# Altium PCB SCP_Controller.PcbDoc (part 2 of 2)
Units mm, origin at the board's own origin, x right, y up, seen from the top; angles counter-clockwise.
Board outline 53.34 x 68.58 mm, 2 copper layers (Top Layer, Bottom Layer); 54 components, 29 nets, 159 pads, 26 vias.
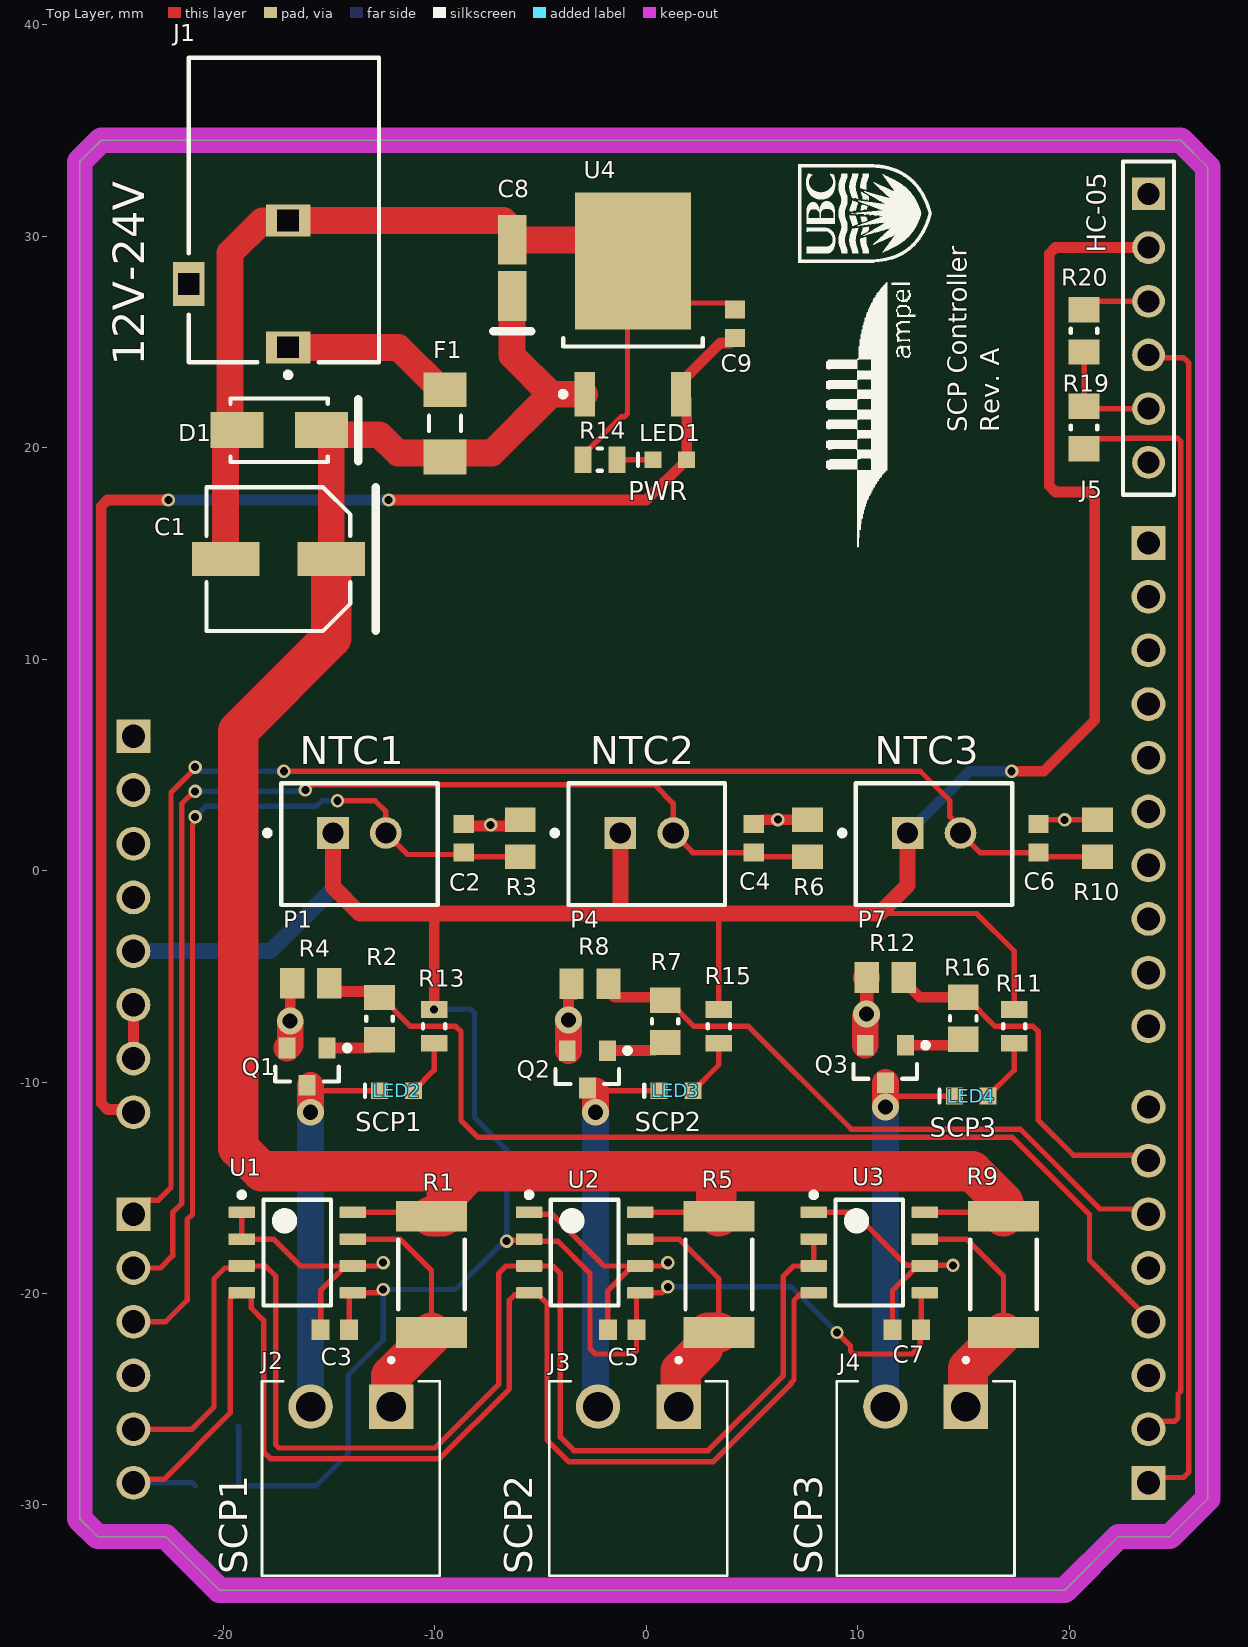
[diagram p0: Top Layer view]

## Part data (continued)
R19: library part CMP-2100-03671-1, "Chip Resistor, 1 KOhm, +/- 1%, 125 mW, -55 to 155 degC, 0805 (2012 Metric), RoHS, Tape and Reel", Case Code (Imperial)=0805, Case Code (Metric)=2012, Manufacturer=Yageo, Manufacturer Part Number=RC0805FR-071KL, Max Operating Temperature=155degC, Max Power Dissipation=125mW, Min Operating Temperature=-55degC, Package Description="2-Pin Surface Mounted Device, Body 2 x 1.25 mm", Package Quantity=1, Resistance=1KOhm, Supplier Part Number 1=311-1.00KCRCT-ND, Temperature Coefficient=100ppm/degreesC, Tolerance=1%, Voltage Rating=150V, Case/Package=0805, Category="Chip SMD Resistors", ComponentLink1Description=https://datasheet.ciiva.com/2456/pyu-r-int-thick-7-2456976.pdf?src-supplier=Digi-Key, ComponentLink1URL=https://datasheet.ciiva.com/2456/pyu-r-int-thick-7-2456976.pdf?src-supplier=Digi-Key, ComponentLink2Description=https://datasheet.ciiva.com/2456/pyu-r-int-thick-7-2456977.pdf?src-supplier=Digi-Key, ComponentLink2URL=https://datasheet.ciiva.com/2456/pyu-r-int-thick-7-2456977.pdf?src-supplier=Digi-Key, ComponentLink3Description=https://datasheet.ciiva.com/7941/1686128-7941719.pdf?src-supplier=Element14, ComponentLink3URL=https://datasheet.ciiva.com/7941/1686128-7941719.pdf?src-supplier=Element14, ComponentLink4Description=https://datasheet.ciiva.com/16850/rc0805-16850409.pdf?src-supplier=Future+Electronics, ComponentLink4URL=https://datasheet.ciiva.com/16850/rc0805-16850409.pdf?src-supplier=Future+Electronics, ComponentLink5Description=https://datasheet.ciiva.com/46385/444164-46385020.pdf?src-supplier=Element14, ComponentLink5URL=https://datasheet.ciiva.com/46385/444164-46385020.pdf?src-supplier=Element14, ComponentLink6Description=https://datasheet.ciiva.com/2456/pyu-r-int-thick-7-2456975.pdf?src-supplier=Digi-Key, ComponentLink6URL=https://datasheet.ciiva.com/2456/pyu-r-int-thick-7-2456975.pdf?src-supplier=Digi-Key, Composition=ThickFilm, Datasheet URL=http://www.yageo.com/NewPortal/yageodocoutput?fileName=/pdf/R-Chip/PYu-RC_Group_51_RoHS_L_5.pdf, Datasheet Version="Rev. 5, 10/2016", Depth=1.25mm, Features="Moisture Resistant", Height=0.024inch, Lead Free=LeadFree, Length=0.079inch, Manufacturer URL=http://www.yageo.com/, Military Standard=Not, Number of Pins=2, Number of Terminations=2, Package Reference=0805, Packaging=TapeandReel, Power Rating=125mW, Pricing 1="1=0.10000, 10=0.04000, 100=0.01630, 1000=0.00731, 2500=0.00635 (USD)", REACH SVHC=Unknown, RoHS=Yes, RoHSCompliant=true, Stock 1=24922919, Supplier 1=Digi-Key, Termination=SMD/SMT, Voltage Rating (DC)=150V, Width=0.049inch
R20: library part CMP-2100-03671-1, "Chip Resistor, 2 KOhm, +/- 1%, 125 mW, -55 to 155 degC, 0805 (2012 Metric), RoHS, Tape and Reel", Case Code (Imperial)=0805, Case Code (Metric)=2012, Manufacturer=Yageo, Manufacturer Part Number=RC0805FR-072KL, Max Operating Temperature=155°C, Max Power Dissipation=125mW, Min Operating Temperature=-55°C, Package Quantity=1, Resistance=2kR, Supplier Part Number 1=311-2.00KCRCT-ND, Temperature Coefficient=100ppm/°C, Tolerance=1%, Voltage Rating=150V, Case/Package=0805, Category="Chip SMD Resistors", ComponentLink1Description=https://datasheet.ciiva.com/11819/0900766b8106beab-11819830.pdf?src-supplier=RSComponents, ComponentLink1URL=https://datasheet.ciiva.com/11819/0900766b8106beab-11819830.pdf?src-supplier=RSComponents, ComponentLink2Description=https://datasheet.ciiva.com/2457/pyu-r-int-thick-7-2457026.pdf?src-supplier=Digi-Key, ComponentLink2URL=https://datasheet.ciiva.com/2457/pyu-r-int-thick-7-2457026.pdf?src-supplier=Digi-Key, ComponentLink3Description=https://datasheet.ciiva.com/2457/pyu-r-int-thick-7-2457027.pdf?src-supplier=Digi-Key, ComponentLink3URL=https://datasheet.ciiva.com/2457/pyu-r-int-thick-7-2457027.pdf?src-supplier=Digi-Key, ComponentLink4Description=https://datasheet.ciiva.com/2457/pyu-r-int-thick-7-2457028.pdf?src-supplier=Digi-Key, ComponentLink4URL=https://datasheet.ciiva.com/2457/pyu-r-int-thick-7-2457028.pdf?src-supplier=Digi-Key, ComponentLink5Description=https://datasheet.ciiva.com/46395/444164-46395128.pdf?src-supplier=Element14, ComponentLink5URL=https://datasheet.ciiva.com/46395/444164-46395128.pdf?src-supplier=Element14, ComponentLink6Description=https://datasheet.ciiva.com/12667/rc0805-12667946.pdf?src-supplier=Mouser, ComponentLink6URL=https://datasheet.ciiva.com/12667/rc0805-12667946.pdf?src-supplier=Mouser, Composition="Thick Film", Depth=1.25mm, Features="Moisture Resistant", Height=0.024inch, Lead Free="Lead Free", Length=2mm, Military Standard=Not, Number of Pins=2, Number of Terminations=2, Packaging="Tape and Reel", Power Rating=125mW, Pricing 1="1=0.10000, 10=0.04000, 100=0.01630, 1000=0.00731, 2500=0.00635 (USD)", REACH SVHC="No SVHC", RoHS=Yes, Stock 1=3783164, Supplier 1=Digi-Key, Termination=SMD/SMT, Voltage Rating (DC)=150V, Width=0.049inch, Working Voltage=150V
U1 U2 U3: library part CMP-0704-00003-2, "Zero-Drift, Bi-Directional Current / Power Monitor, 3 to 5.5 V, -40 to 125 degC, 8-pin SOIC (D8), Green (RoHS & no Sb/Br)", Case/Package=SOIC, Input Offset Voltage (Vos)=10uV, Manufacturer="Texas Instruments", Max Operating Temperature=125°C, Max Supply Voltage=5.5V, Min Operating Temperature=-40°C, Min Supply Voltage=3V, Operating Supply Current=1mA, Output Current=10mA, Package Quantity=2500, Quiescent Current=700uA, Quiescent Current (+/-)(Typ)(mA)=0.7, Rating=Catalog, Supplier Part Number 1=296-23978-1-ND, Accuracy=1%, Category="Amplifiers - Op Amps, Buffer, Instrumentation", CMRR(Min)(dB)=100, Code_JEDEC=MS-012, Common Mode Range(Max)(V)=26, Common Mode Range(Min)(V)=0, Common Mode Rejection Ratio=100dB, ComponentLink1Description="Manufacturer URL", ComponentLink1URL=http://www.ti.com/, ComponentLink2Description=Datasheet, ComponentLink2URL=http://www.ti.com/general/docs/lit/getliterature.tsp?genericPartNumber=INA219&fileType=pdf, ComponentLink3Description="Package Specification", ComponentLink3URL=http://www.ti.com/lit/ml/msoi002j/msoi002j.pdf, ComponentLink4Description=https://datasheet.ciiva.com/15132/getdatasheetpartid-306418-15132613.pdf?src-supplier=Verical, ComponentLink4URL=https://datasheet.ciiva.com/15132/getdatasheetpartid-306418-15132613.pdf?src-supplier=Verical, ComponentLink5Description=https://datasheet.ciiva.com/26875/ina219aidr-26875810.pdf?src-supplier=IIIC, ComponentLink5URL=https://datasheet.ciiva.com/26875/ina219aidr-26875810.pdf?src-supplier=IIIC, ComponentLink6Description=https://datasheet.ciiva.com/1939/ina219-1939579.pdf?src-supplier=Digi-Key, ComponentLink6URL=https://datasheet.ciiva.com/1939/ina219-1939579.pdf?src-supplier=Digi-Key, ComponentLink7Description=https://datasheet.ciiva.com/1939/ina219-1939580.pdf?src-supplier=Digi-Key, ComponentLink7URL=https://datasheet.ciiva.com/1939/ina219-1939580.pdf?src-supplier=Digi-Key, ComponentLink8Description=https://datasheet.ciiva.com/1939/ina219-1939581.pdf?src-supplier=Digi-Key, ComponentLink8URL=https://datasheet.ciiva.com/1939/ina219-1939581.pdf?src-supplier=Digi-Key, ComponentLink9Description=https://datasheet.ciiva.com/2965/ina219-2965727.pdf?src-supplier=Avnet, ComponentLink9URL=https://datasheet.ciiva.com/2965/ina219-2965727.pdf?src-supplier=Avnet, Contact Plating=Gold, DatasheetVersion=SBOS448F, Eco-Plan="Green (RoHS & no Sb/Br)", Gain(V/V)="1, 0.5, 0.25, 0.125", Input Offset (+/-)(Max)(uV)=100, Lead Free="Lead Free", Manufacturer Part Number=INA219AIDR, Mounting Technology="Surface Mount", Number of Amplifiers=1, Number of Pins=8, PackageDescription="8-Pin Plastic Small Outline, Body 4.9 x 3.9 mm, Pitch 1.27 mm", PackageReference=D0008A, PackageVersion="4040047-3/M, 06/2011", Packaging="Tape and Reel", PartNumber=INA219AIDR, Pricing 1="1=2.14000, 10=1.92200, 25=1.81280, 100=1.45020, 250=1.26896, 500=1.23270, 1000=0.97891 (USD)", Radiation Hardening=No, REACH SVHC="No SVHC", Small-Signal Bandwidth(Typ)(MHz)=0.011, Stock 1=5271, SubFamily="Current Shunt Monitor", Supplier 1=Digi-Key, Vs(Max)(V)=5.5, Vs(Min)(V)=3, Weight=0.002561oz
  U1: Address=0x40
  U2: Address=0x41
  U3: Address=0x42
U4: library part CMP-0244-00194-1, Case/Package=DPAK, Dropout Voltage=2V, Manufacturer="ON Semiconductor", Manufacturer Part Number=MC78M09CDTRKG, Max Input Voltage=35V, Max Operating Temperature=125°C, Max Output Current=500mA, Min Operating Temperature=0°C, Min Output Voltage=9V, Package Quantity=1, Power Rating=5W, Quiescent Current=6mA, Supplier Part Number 1=MC78M09CDTRKGOSCT-ND, Category="Voltage Regulators - Linear", ComponentLink1Description=https://datasheet.ciiva.com/2059/mc78m00-d-2059824.pdf?src-supplier=Digi-Key, ComponentLink1URL=https://datasheet.ciiva.com/2059/mc78m00-d-2059824.pdf?src-supplier=Digi-Key, ComponentLink2Description=https://datasheet.ciiva.com/8234/mc78m00-d-8234074.pdf?src-supplier=Avnet, ComponentLink2URL=https://datasheet.ciiva.com/8234/mc78m00-d-8234074.pdf?src-supplier=Avnet, ComponentLink3Description=https://datasheet.ciiva.com/6591/mc78m00-d-6591293.pdf?src-supplier=Digi-Key, ComponentLink3URL=https://datasheet.ciiva.com/6591/mc78m00-d-6591293.pdf?src-supplier=Digi-Key, ComponentLink4Description=https://datasheet.ciiva.com/2059/mc78m00-d-2059823.pdf?src-supplier=Digi-Key, ComponentLink4URL=https://datasheet.ciiva.com/2059/mc78m00-d-2059823.pdf?src-supplier=Digi-Key, Contact Plating=Tin,Matte, Halogen Free="Halogen Free", Height=2.38mm, Lead Free="Lead Free", Length=6.73mm, Min Input Voltage=35V, Mount="Surface Mount", Nominal Output Voltage=9V, Number of Outputs=1, Number of Pins=3, Number of Regulators=1, Output Current=500mA, Output Type=Fixed, Output Voltage=9V, Packaging="Tape and Reel", Polarity=Positive, Pricing 1="1=0.43000, 10=0.37000, 25=0.34520, 100=0.25650, 250=0.21708, 500=0.20720, 1000=0.15294 (USD)", Radiation Hardening=No, REACH SVHC="No SVHC", RoHS=Yes, Stock 1=7157, Supplier 1=Digi-Key, Width=6.22mm

## Via types
v1: diameter 0.635, hole 0.381, Top Layer to Bottom Layer, 20 vias
v2: diameter 1.27, hole 0.711, Top Layer to Bottom Layer, 6 vias

## Nets (pads, with @x,y where several pads share a name; then routed paths per layer and width w, separated by ;. In a path a pad name is that pad's centre, name@x,y a point inside that pad or via, vN(x,y) a via of type N, cw(c..) or ccw(c..) an arc to the next point about the centre after c; other vN are vias at no path point)
+5V: C3.1 C5.1 C7.1 J5.2 P1.1 P2.5 P4.1 P7.1 R13.1 R15.1 R16.1 R17.2 R18.2 U1.5 U2.2 U2.5 U3.5 | length 181.2
  Top Layer w0.254: C3.1 -14.057,-20.115 -13.909,-19.967 U1.5 -12.705,-19.967 -12.549,-19.812 v1(-12.446,-19.812) ; v1(-6.604,-17.526) -6.555,-17.477 -5.595,-17.477 U2.2 -5.447,-17.526 -4.191,-17.526 -2.667,-19.05 -2.667,-22.606 -2.413,-22.86 -0.635,-22.86 -0.468,-22.693 C5.1 -0.468,-20.115 -0.32,-19.967 U2.5 0.734,-19.967 v1(1.016,-19.685) ; 3.302,-2.032 3.429,-2.159 R15.1 ; v1(9.017,-21.844) 9.652,-22.479 9.652,-22.711 9.801,-22.86 12.573,-22.86 12.954,-22.479 12.954,-21.757 C7.1 ; 11.01,-2.032 15.621,-2.032 17.399,-3.81 R16.1@17.399,-6.439 ; C7.1@12.994,-21.514 U3.5@12.994,-20.115 ; U3.5@12.994,-19.912 U3.5@12.994,-20.115 ; U3.5 13.142,-19.967 U3.5@12.994,-20.115 ; R16.1@17.272,-6.439 R16.1
  Top Layer w0.508: v1(-10.033,-6.566) -10.033,-2.032 -10.033,-1.994 ; v1(17.272,4.699) 18.796,4.699 21.209,7.112 21.209,17.609 20.911,17.907 19.348,17.907 19.05,18.205 19.05,29.166 19.348,29.464 J5.2@24.031,29.464
  Top Layer w0.762: P2.5 P2.5@-24.257,-3.771 ; P1.1 -14.82,-0.764 -13.552,-2.032 -10.033,-2.032 -1.231,-2.032 3.302,-2.032 11.01,-2.032 12.358,-0.684 P7.1 ; -1.231,-1.994 P4.1
  Bottom Layer w0.254: R17.2 -19.278,-26.289 -19.278,-29.043 R18.2 -15.631,-29.093 -14.097,-27.559 -14.097,-23.864 -12.446,-22.213 v1(-12.446,-19.812) -9.017,-19.812 -6.907,-17.702 -6.884,-17.702 -6.707,-17.526 v1(-6.604,-17.526) -6.604,-13.208 -8.128,-11.684 -8.128,-6.731 -8.293,-6.566 v1(-10.033,-6.566) ; v1(1.016,-19.685) 6.858,-19.685 v1(9.017,-21.844)
  Bottom Layer w0.508: P7.1 15.279,4.699 v1(17.272,4.699)
  Bottom Layer w0.762: P2.5 -17.78,-3.81 -14.82,-0.85 P1.1
+9V: C9.1 LED1.2 P2.8 U4.3 | length 65.7
  Top Layer w0.254: P2.8@-24.384,-11.303 P2.8 ; U4.3@1.905,22.269 U4.3 1.645,23.104 U4.3@1.993,23.452 ; C9.1@3.954,24.956 C9.1
  Top Layer w0.508: P2.8@-24.384,-11.303 -25.483,-11.303 -25.781,-11.005 -25.781,17.228 -25.483,17.526 v1(-22.606,17.526) ; v1(-12.192,17.526) 0,17.526 LED1.2 U4.3@1.905,22.269 ; U4.3@1.993,23.452 3.497,24.956 C9.1@3.954,24.956
  Bottom Layer w0.508: v1(-22.606,17.526) v1(-12.192,17.526)
GND: C1.2 C2.2 C3.2 C4.2 C5.2 C6.2 C7.2 C8.2 C9.2 D1.1 J1.2 J5.3 P2.6 P2.7 Q1.2 Q2.2 Q3.2 R3.1 R4.1 R6.1 R8.1 R10.1 R12.1 R14.1 R20.1 U1.1 U1.2 U1.6 U2.1 U2.6 U3.1 U3.6 U4.4 | length 113.5
  Top Layer w0.254: U1.1 U1.2 -17.625,-17.427 -16.355,-18.697 U1.6@-14.235,-18.697 ; C3.2 -15.407,-19.869 U1.6@-14.235,-18.697 ; v1(-12.446,-18.542) -12.549,-18.542 -12.705,-18.697 U1.6 U1.6@-14.235,-18.697 ; -6.742,2.112 R3.1@-6.455,2.399 ; U2.1@-5.518,-16.129 U2.1 -5.447,-16.256 -4.445,-16.256 -2.004,-18.697 U2.6@-0.646,-18.697 ; R14.1 -2.997,19.656 -1.19,21.463 -1.038,21.463 -0.889,21.612 -0.889,28.376 0.646,26.841 3.893,26.841 C9.2 C9.2@4.489,26.245 ; C5.2 -1.818,-19.869 U2.6@-0.646,-18.697 ; U4.4 U4.4@1.905,31.369 ; v1(1.016,-18.542) 0.913,-18.542 0.757,-18.697 U2.6 U2.6@-0.646,-18.697 ; C4.2@5.207,2.199 C4.2@5.407,2.399 ; U3.1 9.793,-16.157 12.309,-18.674 12.792,-18.674 U3.6@12.816,-18.697 ; v2@10.414,-6.858 v2(10.414,-6.782) ; C7.2 11.644,-19.869 U3.6@12.816,-18.697 ; v1(14.503,-18.669) 13.194,-18.669 U3.6 U3.6@12.816,-18.697 ; C6.2 18.742,2.399 v1(19.785,2.399) R10.1@20.828,2.399 ; R20.1 21.098,26.924 J5.3 ; J5.3@23.968,27.023 J5.3@24.066,26.924
  Top Layer w0.508: P2.7 P2.6 ; R4.1@-16.863,-5.719 -16.844,-5.738 v2(-16.844,-7.112) ; Q1.2@-16.844,-8.371 Q1.2@-16.825,-8.39 ; C2.2@-8.509,2.112 -6.742,2.112 ; R3.1@-6.455,2.399 R3.1@-6.366,2.31 ; v2(-3.683,-7.061) -3.683,-6.035 R8.1@-3.509,-5.861 ; R8.1@-3.401,-5.842 R8.1@-3.382,-5.861 ; v2@-3.382,-7.384 v2@-3.382,-7.178 ; C4.2@5.407,2.399 R6.1@7.493,2.399 ; v2(10.414,-6.782) R12.1@10.414,-5.094
  Top Layer w0.635: v2(10.414,-6.782) 10.421,-6.775 R12.1@10.421,-5.087 ; R12.1@10.421,-5.062 R12.1
  Top Layer w1.27: C1.2 -19.899,20.613 -19.684,20.828 D1.1@-19.47,20.828 ; D1.1 D1.1@-19.47,20.828 ; Q1.2 -16.844,-8.237 v2(-16.844,-7.112) ; Q2.2@-3.683,-8.513 v2(-3.683,-7.061) ; U4.4 -1.634,29.828 C8.2 -6.35,30.328 -6.764,30.742 J1.2 -16.953,30.734 -18.161,30.734 -19.685,29.21 -19.685,21.043 D1.1@-19.47,20.828 ; Q3.2 10.353,-6.919 v2@10.414,-6.858 ; R12.1@10.414,-5.069 R12.1@10.421,-5.062
  other v1: -7.366,2.159 6.223,2.413
NetC2_1: C2.1 P1.2 P3.3 R3.2 | length 42.9
  Top Layer w0.254: P3.3 -22.733,-21.336 -21.717,-20.32 -21.717,-16.51 -21.463,-16.256 -21.463,2.201 -21.409,2.255 -21.409,2.467 v1(-21.336,2.54) ; v1(-14.605,3.302) -12.827,3.302 -12.32,2.795 P1.2 -11.304,0.762 -8.509,0.762 -8.396,0.649 R3.2@-6.455,0.649
  Bottom Layer w0.254: v1(-21.336,2.54) -20.828,3.048 -15.597,3.048 -15.343,3.302 v1(-14.605,3.302)
NetC4_1: C4.1 P3.2 P4.2 R6.2 | length 55.7
  Top Layer w0.254: P3.2 -22.987,-18.796 -22.4,-18.209 -22.4,-16.177 -21.971,-15.748 -21.971,3.175 v1@-21.399,3.746 ; v1(-16.129,3.81) -16.044,3.81 -15.79,4.064 0.381,4.064 1.269,3.176 P4.2 2.198,0.849 5.207,0.849 5.407,0.649 R6.2@7.493,0.649
  Bottom Layer w0.254: v1@-21.399,3.746 -16.192,3.746 v1(-16.129,3.81)
  other v1: -21.336,3.746
NetC6_1: C6.1 P3.1 P7.2 R10.2 | length 67.2
  Top Layer w0.254: P3.1 -23.584,-15.583 -23.076,-15.583 -22.479,-14.986 -22.479,3.683 -21.336,4.826 v1(-21.336,4.889) ; v1(-17.145,4.699) 12.954,4.699 14.351,3.302 14.351,2.55 14.858,2.043 P7.2 15.787,0.849 C6.1 18.742,0.649 R10.2@20.828,0.649
  Bottom Layer w0.254: v1(-21.336,4.889) -21.145,4.699 v1(-17.145,4.699)
NetF1_1: F1.1 J1.1 | length 8.3
  Top Layer w1.27: J1.1 -11.719,24.742 -9.715,22.738 F1.1
NetJ2_1: J2.1 R1.1 U1.7 | length 11.7
  Top Layer w0.254: U1.7 -11.656,-17.427 -10.16,-18.923 R1.1 ; R1.1@-11.608,-21.438 R1.1@-11.444,-21.438
  Top Layer w1.905: J2.1 -12.065,-23.889 -10.16,-21.984 R1.1
NetJ2_2: J2.2 LED2.1 Q1.3 | length 18.6
  Top Layer w0.254: Q1.3@-15.875,-10.16 -15.621,-10.414 LED2.1
  Top Layer w1.27: v2(-15.875,-11.43) Q1.3@-15.875,-10.16
  Bottom Layer w1.27: J2.2 v2(-15.875,-11.43)
NetJ3_1: J3.1 R5.1 U2.7 | length 11.6
  Top Layer w0.254: U2.7 1.552,-17.427 3.429,-19.304 R5.1
  Top Layer w1.905: J3.1 1.622,-25.252 1.622,-23.651 2.706,-22.567 2.706,-22.072 2.934,-21.844 R5.1
NetJ3_2: J3.2 LED3.1 Q2.3 | length 18.4
  Top Layer w0.254: Q2.3 -2.66,-10.414 -2.413,-10.414 LED3.1
  Top Layer w1.27: v2(-2.413,-11.43) Q2.3@-2.413,-10.414
  Bottom Layer w1.27: v2(-2.413,-11.43) -2.413,-25.222 J3.2
NetJ4_1: J4.1 R9.1 U3.7 | length 11.5
  Top Layer w0.254: U3.7 15.141,-17.427 16.891,-19.177 R9.1 ; R9.1@15.443,-21.438 R9.1@15.607,-21.438
  Top Layer w1.905: J4.1 15.211,-25.252 15.211,-23.541 16.891,-21.86 R9.1
NetJ4_2: J4.2 LED4.1 Q3.3 | length 18.8
  Top Layer w0.254: v2(11.303,-11.176) 11.811,-10.668 LED4.1
  Top Layer w1.27: v2(11.303,-11.176) Q3.3
  Bottom Layer w1.27: J4.2 v2(11.303,-11.176)
NetJ5_4: J5.4 P5.1 | length 56.2
  Top Layer w0.254: P5.1@23.749,-28.702 25.4,-28.702 25.654,-28.448 25.654,24.003 25.4,24.257 24.193,24.257 J5.4@24.066,24.384
NetJ5_5: J5.5 R19.2 R20.2 | length 5.7
  Top Layer w0.254: R20.2 R19.2 20.812,21.844 J5.5
NetLED1_1: LED1.1 R14.2 | length 1.7
  Top Layer w0.254: R14.2 LED1.1
NetLED2_2: LED2.2 R13.2 | length 2.7
  Top Layer w0.254: LED2.2 -10.033,-9.436 R13.2
NetLED3_2: LED3.2 R15.2 | length 2.8
  Top Layer w0.254: LED3.2 3.429,-9.182 R15.2
NetLED4_2: LED4.2 R16.2 | length 3
  Top Layer w0.254: LED4.2 17.399,-9.436 R16.2
NetP3_5: P3.5 R17.1 U1.3 U2.3 U3.2 U3.3 | length 72.7
  Top Layer w0.254: P3.5 -21.494,-26.416 -20.447,-25.369 -20.447,-19.304 -19.939,-18.796 -19.106,-18.796 U1.3@-19.008,-18.697 ; U1.3 U1.3@-19.008,-18.697 ; U3.2 U3.3 6.957,-18.697 6.477,-19.177 6.477,-23.876 2.921,-27.432 -3.429,-27.432 -4.064,-26.797 -4.064,-19.05 -4.417,-18.697 U2.3 -6.632,-18.697 -6.985,-19.05 -6.985,-24.301 -9.989,-27.305 -17.377,-27.305 -17.526,-27.156 -17.526,-19.177 -18.006,-18.697 U1.3@-19.008,-18.697
  Bottom Layer w0.254: P3.5 -21.455,-26.416 R17.1
NetP3_6: P3.6 R18.1 U1.4 U2.4 U3.4 | length 67.7
  Top Layer w0.254: P3.6 -24.092,-28.791 -22.822,-28.791 -19.685,-25.654 -19.685,-20.264 -19.633,-20.212 -19.633,-20.115 -19.485,-19.967 -18.835,-19.967 -18.687,-20.115 -18.687,-20.683 -18.097,-21.273 -18.097,-27.496 -17.78,-27.813 -9.779,-27.813 -6.477,-24.511 -6.477,-20.32 -6.223,-20.066 -5.645,-20.066 U2.4 -5.196,-19.967 -4.699,-20.464 -4.699,-26.924 -3.661,-27.962 3.153,-27.962 6.858,-24.257 6.858,-24.213 6.985,-24.086 6.985,-20.32 7.239,-20.066 7.817,-20.066 U3.4
  Bottom Layer w0.254: P3.6 -21.465,-28.956 R18.1
NetP5_2: P5.2 R19.1 | length 52.6
  Top Layer w0.254: R19.1 21.174,20.428 22.601,20.428 22.62,20.447 25.124,20.447 25.273,20.298 25.273,-24.638 25.146,-24.765 25.146,-25.886 24.997,-26.035 23.876,-26.035 P5.2@23.749,-26.162
NetP5_4: P5.4 R2.1 R4.2 | length 48.4
  Top Layer w0.254: R2.1@-12.635,-6.005 -12.511,-6.005 -11.15,-7.366 -9.017,-7.366 -8.763,-7.62 -8.763,-11.811 -7.959,-12.615 17.314,-12.615 20.955,-16.256 20.955,-18.415 23.622,-21.082 P5.4@23.749,-21.082
  Top Layer w0.508: R4.2@-15.113,-5.719 -13.106,-5.719 R2.1@-13.106,-5.659
NetP5_6: P5.6 R7.1 R8.2 | length 29.6
  Top Layer w0.254: R7.1@0.746,-5.985 R7.1 1.014,-6.128 2.252,-7.366 4.826,-7.366 9.694,-12.234 17.695,-12.234 21.463,-16.002 P5.6@23.749,-16.002
  Top Layer w0.508: R8.2@-1.651,-5.842 -1.508,-5.985 R7.1@0.746,-5.985
NetP5_7: P5.7 R11.1 R12.2 | length 17.6
  Top Layer w0.254: R12.2@12.178,-5.205 R12.2 ; R11.1 15.108,-5.985 16.489,-7.366 18.288,-7.366 18.542,-7.62 18.542,-11.811 20.193,-13.462 P5.7@23.749,-13.462
  Top Layer w0.508: R12.2@12.178,-5.23 12.933,-5.985 R11.1
NetQ1_1: Q1.1 R2.2 | length 2.3
  Top Layer w0.508: Q1.1@-14.925,-8.39 -13.145,-8.39 R2.2@-12.76,-8.005
NetQ2_1: Q2.1 R7.2 | length 2.5
  Top Layer w0.508: Q2.1@-1.463,-8.513 0.379,-8.513 0.764,-8.128 R7.2
NetQ3_1: Q3.1 R11.2 | length 2.4
  Top Layer w0.254: R11.2@14.514,-8.259 R11.2@14.605,-8.35
  Top Layer w0.508: Q3.1 R11.2@14.514,-8.259
V_SCP: C1.1 C8.1 D1.2 F1.2 R1.2 R5.2 R9.2 U1.8 U2.8 U3.8 U4.1 | length 112
  Top Layer w0.254: U1.8 -10.347,-16.157 R1.2 ; U4.1 U4.1@-2.915,23.104 ; U2.8 R5.2@3.216,-16.157 ; R5.2@1.981,-15.938 R5.2@2.931,-15.938 ; U3.8 16.704,-16.157 R9.2 ; R9.2@15.443,-15.938 R9.2@16.393,-15.938
  Top Layer w1.27: D1.2 -15.114,20.828 D1.2@-14.899,20.613 ; C1.1 D1.2@-14.899,20.613 ; C8.1 -6.35,24.357 -4.522,22.529 ; U4.1 -4.522,22.529 ; D1.2@-14.899,20.613 -12.612,20.613 -11.747,19.748 -9.715,19.748 F1.2 -9.335,19.748 -7.303,19.748 -4.522,22.529
  Top Layer w1.905: C1.1 -14.899,11.009 -19.304,6.604 -19.304,-13.108 -18.188,-14.224 -8.322,-14.224 ; R1.2 -9.665,-16.344 -9.437,-16.117 -9.437,-15.34 -8.322,-14.224 ; R5.2 3.302,-16.217 3.302,-14.224 ; R9.2 16.891,-15.707 15.408,-14.224 3.302,-14.224 ; -8.322,-14.224 3.302,-14.224
pads on no net: J1.3 J5.1 J5.6 P2.1 P2.2 P2.3 P2.4 P3.4 P5.3 P5.5 P5.8 P6.1 P6.2 P6.3 P6.4 P6.5 P6.6 P6.7 P6.8 P6.9 P6.10

## Polygon pours and split planes (outlines as drawn)
GND on Bottom Layer "GND_L02_P003" (solid, pour order 3): -26.797,33.528 -25.781,34.544 25.273,34.544 26.289,33.528 26.289,-29.972 24.765,-31.496 22.225,-31.496 19.939,-33.782 19.939,-34.036 -20.193,-34.036 -22.733,-31.496 -26.035,-31.496 -26.797,-30.734

## Keep-outs
Keep-Out Layer:
  the board outline again, w1.2

## Silkscreen, mask and mechanical layers (free items; w line width, h text height)
Top Overlay:
  drawing of 26 lines, arcs and shapes, not listed
  text "HC-05" at 22.034,29.23 h1.52 r90
  text "12V-24V" at -23.241,23.876 h2.54 r90
  text "SCP Controller / Rev. A" at 16.99,20.74 h1.52 r90
  text "PWR" at -0.849,17.209 h1.52
  text "NTC1" at -16.381,4.574 h2.29
  text "NTC2" at -2.665,4.574 h2.29
  text "NTC3" at 10.797,4.574 h2.29
  text "SCP1" at -13.765,-12.636 h1.52
  text "SCP2" at -0.557,-12.636 h1.52
  text "SCP3" at 13.413,-12.89 h1.52
  text "SCP1" at -18.417,-33.272 h2.29 r90
  text "SCP2" at -4.955,-33.272 h2.29 r90
  text "SCP3" at 8.761,-33.272 h2.29 r90

## Dimensions
25.273,34.544 to 19.787,-34.036 on Dimensions
-26.797,33.528 to 26.543,33.274 on Dimensions

## Text inside footprints (layer, text, board x,y; h text height)
P2: Bottom Overlay "1" at -21.336,6.477 h1.02 r90; Bottom Overlay "8" at -21.336,-11.049 h1.02 r90
P3: Bottom Overlay "1" at -21.26,-16.154 h1.02 r90; Bottom Overlay "6" at -21.311,-30.429 h1.02 r90
P5: Bottom Overlay "1" at 20.93,-29.235 h1.02 r270; Bottom Overlay "8" at 20.98,-11.455 h1.02 r270
P6: Bottom Overlay "1" at 22.049,15.614 h1.02 r90; Bottom Overlay "10" at 22.049,-6.736 h1.02 r90